# Altium PCB TAUV-Regulated_Power_board.PcbDoc (part 2 of 2)
Units mil, origin at the board's own origin, x right, y up, seen from the top; angles counter-clockwise.
Board outline 4762.5 x 3417.5 mil, 6 copper layers (1-Top, 2-GND1, 3-Signal1, 4-Hi_PWR, 5-GND2, 6-Bottom), stack 32.112 mil thick; 171 components, 113 nets, 521 pads, 65 vias.
Unrouted connection lines stored in the file: 296.
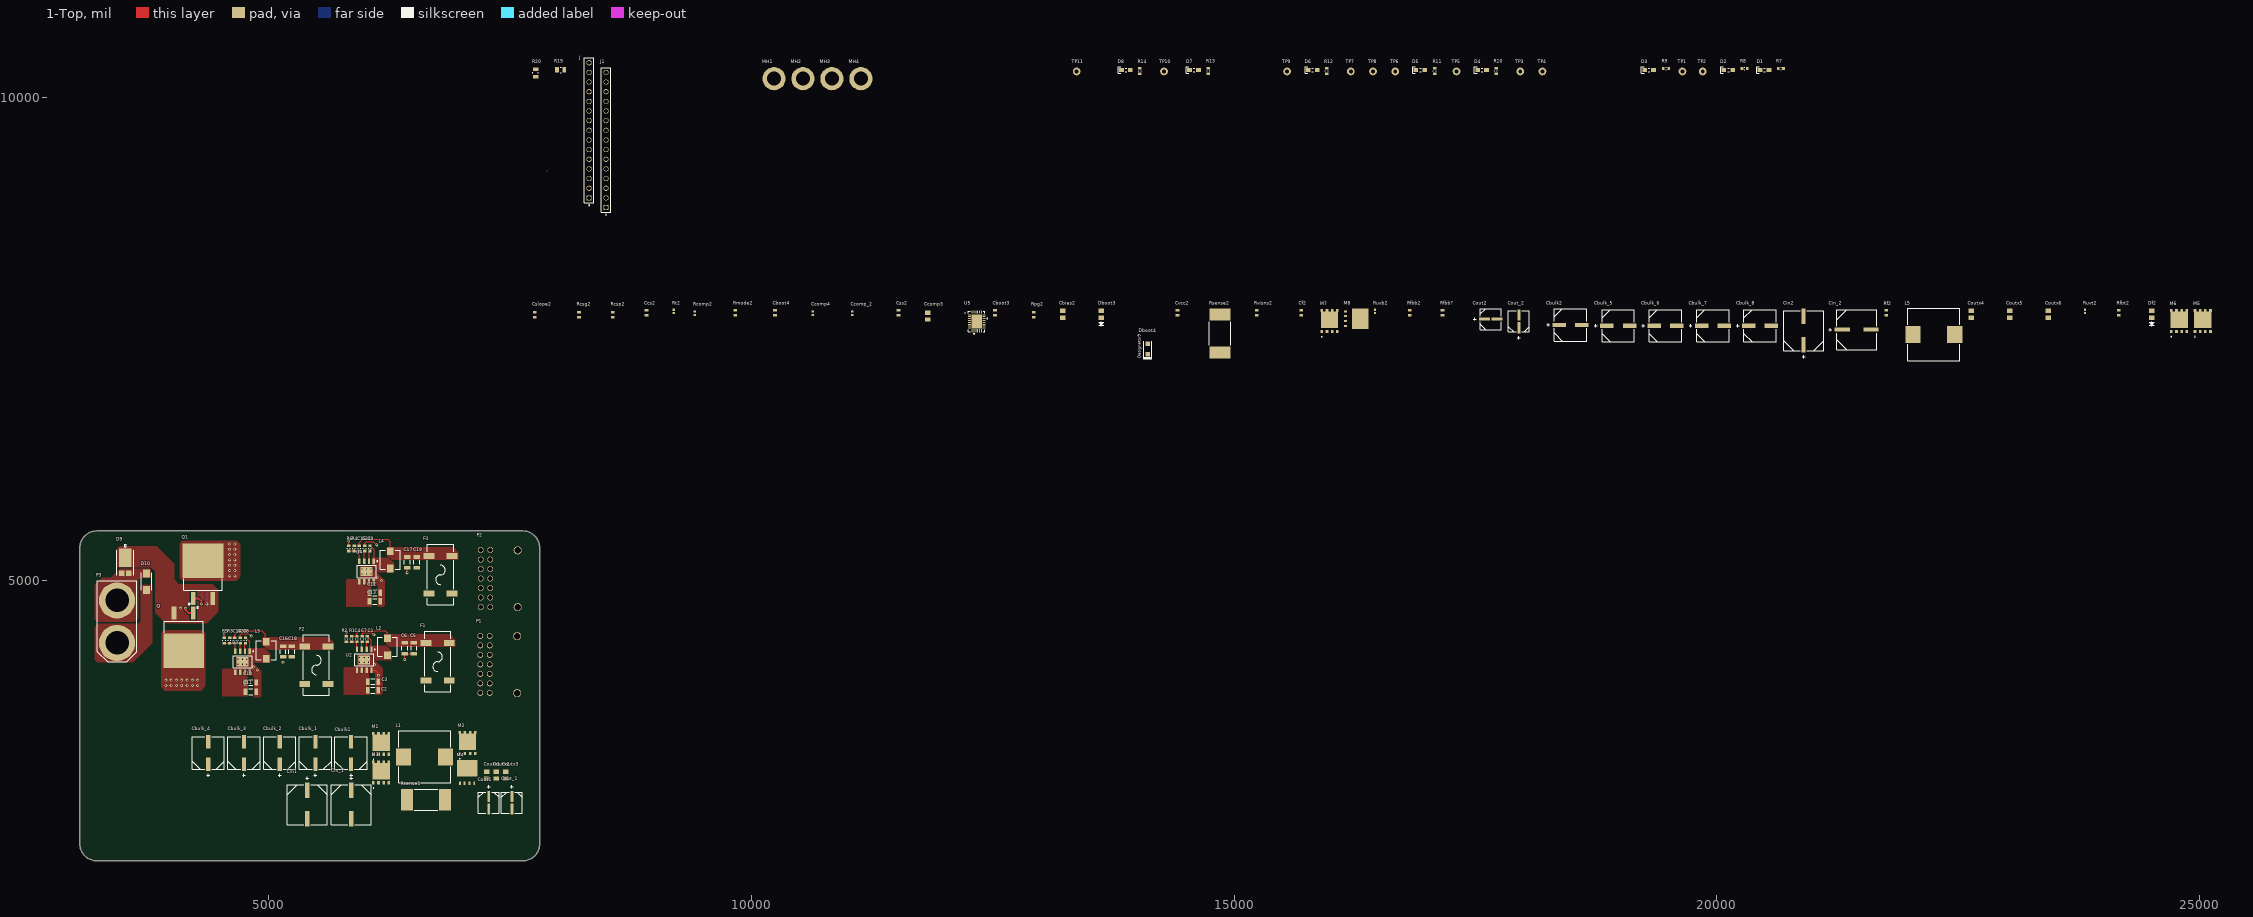
[diagram p0: 1-Top view]

## Polygon pours and split planes (outlines as drawn) (continued)
GND on 1-Top "GND_L01_P013" (solid, pour order 13): 3230,4550 3200,4520 3200,4175 3225,4150 3600,4150 3795,4345 3795,4940 3780,4955 3695,4955 3675,4935 3675,4575 3650,4550
VBAT on 1-Top "VBAT_L01_P012" (solid, pour order 12): 3365,5025 3275,5025 3200,4950 3200,4595 3225,4570 3615,4570 3650,4605 3650,5005 3670,5025 3775,5025 3780,5030 3780,5115 3775,5120 3460,5120
GND on 1-Top "GND_L01_P003" (solid, pour order 3): 5920,4235 5920,4120 5942.95,4097.05 5942.95,4041.18 5987.05,4041.18 5988.23,4040 6090,4040 6105,4025 6105,3815 6165,3815 6180,3830 6180,4090 6035,4235
GND on 1-Top "GND_L01_P005" (solid, pour order 5): 5945,5145 5945,5030 5967.95,5007.05 5967.95,4951.18 6012.05,4951.18 6013.23,4950 6115,4950 6130,4935 6130,4725 6190,4725 6205,4740 6205,5000 6060,5145
GND on 1-Top "GND_L01_P009" (solid, pour order 9): 4665,4205 4665,4090 4687.95,4067.05 4687.95,4011.18 4732.05,4011.18 4733.23,4010 4835,4010 4850,3995 4850,3785 4910,3785 4925,3800 4925,4060 4780,4205
NetC9_1 on 1-Top "NETC9_1_L01_P007" (solid, pour order 7): 6070,5230 6070,5150 6140,5080 6300,5080 6300,5175 6245,5230 6145,5230
NetC15_2 on 1-Top "NETC15_2_L01_P006" (solid, pour order 6): 6965,5285 6910,5340 6225,5340 6225,5260 6275,5210 6965,5210
NetC1_1 on 1-Top "NETC1_1_L01_P002" (solid, pour order 2): 6045,4320 6045,4240 6115,4170 6275,4170 6275,4265 6220,4320 6120,4320
NetC4_2 on 1-Top "NETC4_2_L01_P000" (solid, pour order 0): 6935,4385 6880,4440 6195,4440 6195,4360 6245,4310 6935,4310
NetC14_2 on 1-Top "NETC14_2_L01_P011" (solid, pour order 11): 5675,4355 5620,4410 4935,4410 4935,4330 4985,4280 5675,4280
NetC8_1 on 1-Top "NETC8_1_L01_P010" (solid, pour order 10): 4785,4295 4785,4215 4855,4145 5015,4145 5015,4240 4960,4295 4860,4295
VCC_BATT_FILT on 1-Top "VCC_BATT_FILT_L01_P008" (solid, pour order 8): 4776.69,4070.73 4762.58,4084.84 4527.58,4084.84 4517.58,4074.84 4517.58,3799.84 4782.58,3799.84 4782.58,3974.84 4776.69,3980.73
VCC_BATT_FILT on 1-Top "VCC_BATT_FILT_L01_P004" (solid, pour order 4): 6061.61,4995.89 6047.5,5010 5812.5,5010 5802.5,5000 5802.5,4725 6067.5,4725 6067.5,4900 6061.61,4905.89
VCC_BATT_FILT on 1-Top "VCC_BATT_FILT_L01_P001" (solid, pour order 1): 6039.11,4085.89 6025,4100 5790,4100 5780,4090 5780,3815 6045,3815 6045,3990 6039.11,3995.89
VCC_BATT_FILT on 4-Hi_PWR "VCC_BATT_FILT_L04_P017" (solid, pour order 17): 4105,5475 3820,5190 3820,3975 4160,3635 7340,3635 7470,3765 7470,5345 7340,5475
no net on 2-GND1 (split plane): 7643.56,5489.6 7654.56,5488.42 7665.45,5486.46 7676.17,5483.72 7686.67,5480.23 7696.89,5475.99 7706.78,5471.04 7716.3,5465.39 7725.39,5459.08 7734,5452.14 7742.1,5444.6 7749.64,5436.5 7756.58,5427.89 7762.89,5418.8 7768.54,5409.28 7773.49,5399.39 7777.73,5389.17 7781.22,5378.67 7783.96,5367.95 7785.92,5357.06 7787.1,5346.06 7787.47,5335.71 7787.4,5335 7787.4,2267.5 7787.47,2266.79 7787.1,2256.44 7785.92,2245.44 7783.96,2234.55 7781.22,2223.83 7777.73,2213.33 7773.49,2203.11 7768.54,2193.22 7762.89,2183.7 7756.58,2174.61 7749.64,2166 7742.1,2157.9 7734,2150.36 7725.39,2143.42 7716.3,2137.11 7706.78,2131.46 7696.89,2126.51 7686.67,2122.27 7676.17,2118.78 7665.45,2116.04 7654.56,2114.08 7643.56,2112.9 7633.21,2112.53 7632.5,2112.6 3220,2112.6 3219.29,2112.53 3208.94,2112.9 3197.94,2114.08 3187.05,2116.04 3176.33,2118.78 3165.83,2122.27 3155.61,2126.51 3145.72,2131.46 3136.2,2137.11 3127.11,2143.42 3118.5,2150.36 3110.4,2157.9 3102.86,2166 3095.92,2174.61 3089.61,2183.7 3083.96,2193.22 3079.01,2203.11 3074.77,2213.33 3071.28,2223.83 3068.54,2234.55 3066.58,2245.44 3065.4,2256.44 3065.03,2266.79 3065.1,2267.5 3065.1,5335 3065.03,5335.71 3065.4,5346.06 3066.58,5357.06 3068.54,5367.95 3071.28,5378.67 3074.77,5389.17 3079.01,5399.39 3083.96,5409.28 3089.61,5418.8 3095.92,5427.89 3102.86,5436.5 3110.4,5444.6 3118.5,5452.14 3127.11,5459.08 3136.2,5465.39 3145.72,5471.04 3155.61,5475.99 3165.83,5480.23 3176.33,5483.72 3187.05,5486.46 3197.94,5488.42 3208.94,5489.6 3219.29,5489.97 3220,5489.9 7632.5,5489.9 7633.21,5489.97
no net on 5-GND2 (split plane): 7643.56,5489.6 7654.56,5488.42 7665.45,5486.46 7676.17,5483.72 7686.67,5480.23 7696.89,5475.99 7706.78,5471.04 7716.3,5465.39 7725.39,5459.08 7734,5452.14 7742.1,5444.6 7749.64,5436.5 7756.58,5427.89 7762.89,5418.8 7768.54,5409.28 7773.49,5399.39 7777.73,5389.17 7781.22,5378.67 7783.96,5367.95 7785.92,5357.06 7787.1,5346.06 7787.47,5335.71 7787.4,5335 7787.4,2267.5 7787.47,2266.79 7787.1,2256.44 7785.92,2245.44 7783.96,2234.55 7781.22,2223.83 7777.73,2213.33 7773.49,2203.11 7768.54,2193.22 7762.89,2183.7 7756.58,2174.61 7749.64,2166 7742.1,2157.9 7734,2150.36 7725.39,2143.42 7716.3,2137.11 7706.78,2131.46 7696.89,2126.51 7686.67,2122.27 7676.17,2118.78 7665.45,2116.04 7654.56,2114.08 7643.56,2112.9 7633.21,2112.53 7632.5,2112.6 3220,2112.6 3219.29,2112.53 3208.94,2112.9 3197.94,2114.08 3187.05,2116.04 3176.33,2118.78 3165.83,2122.27 3155.61,2126.51 3145.72,2131.46 3136.2,2137.11 3127.11,2143.42 3118.5,2150.36 3110.4,2157.9 3102.86,2166 3095.92,2174.61 3089.61,2183.7 3083.96,2193.22 3079.01,2203.11 3074.77,2213.33 3071.28,2223.83 3068.54,2234.55 3066.58,2245.44 3065.4,2256.44 3065.03,2266.79 3065.1,2267.5 3065.1,5335 3065.03,5335.71 3065.4,5346.06 3066.58,5357.06 3068.54,5367.95 3071.28,5378.67 3074.77,5389.17 3079.01,5399.39 3083.96,5409.28 3089.61,5418.8 3095.92,5427.89 3102.86,5436.5 3110.4,5444.6 3118.5,5452.14 3127.11,5459.08 3136.2,5465.39 3145.72,5471.04 3155.61,5475.99 3165.83,5480.23 3176.33,5483.72 3187.05,5486.46 3197.94,5488.42 3208.94,5489.6 3219.29,5489.97 3220,5489.9 7632.5,5489.9 7633.21,5489.97

## Silkscreen, mask and mechanical layers (free items; w line width, h text height)
Mechanical 7:
  the board outline again, w10

## Text inside footprints (layer, text, board x,y; h text height)
Dboot2: Bottom Overlay "Designator9" at 6224,2993 h50 r270
Dboot4: Top Overlay "Designator9" at 14046,7298 h50 r90
U1: Mechanical 13 "*" at 6670,3158.76 h50; Bottom Overlay "*" at 6727,3158.76 h50
U5: Top Overlay "*" at 12205,7733.76 h50; Mechanical 13 "*" at 12262,7733.76 h50